# Altium PCB PCB_main.pcbdoc
Units mm, origin at the board's own origin, x right, y up, seen from the top; angles counter-clockwise.
Board outline 110 x 80 mm, 2 copper layers (Top Layer, Bottom Layer); 67 components, 60 nets, 247 pads, 42 vias.
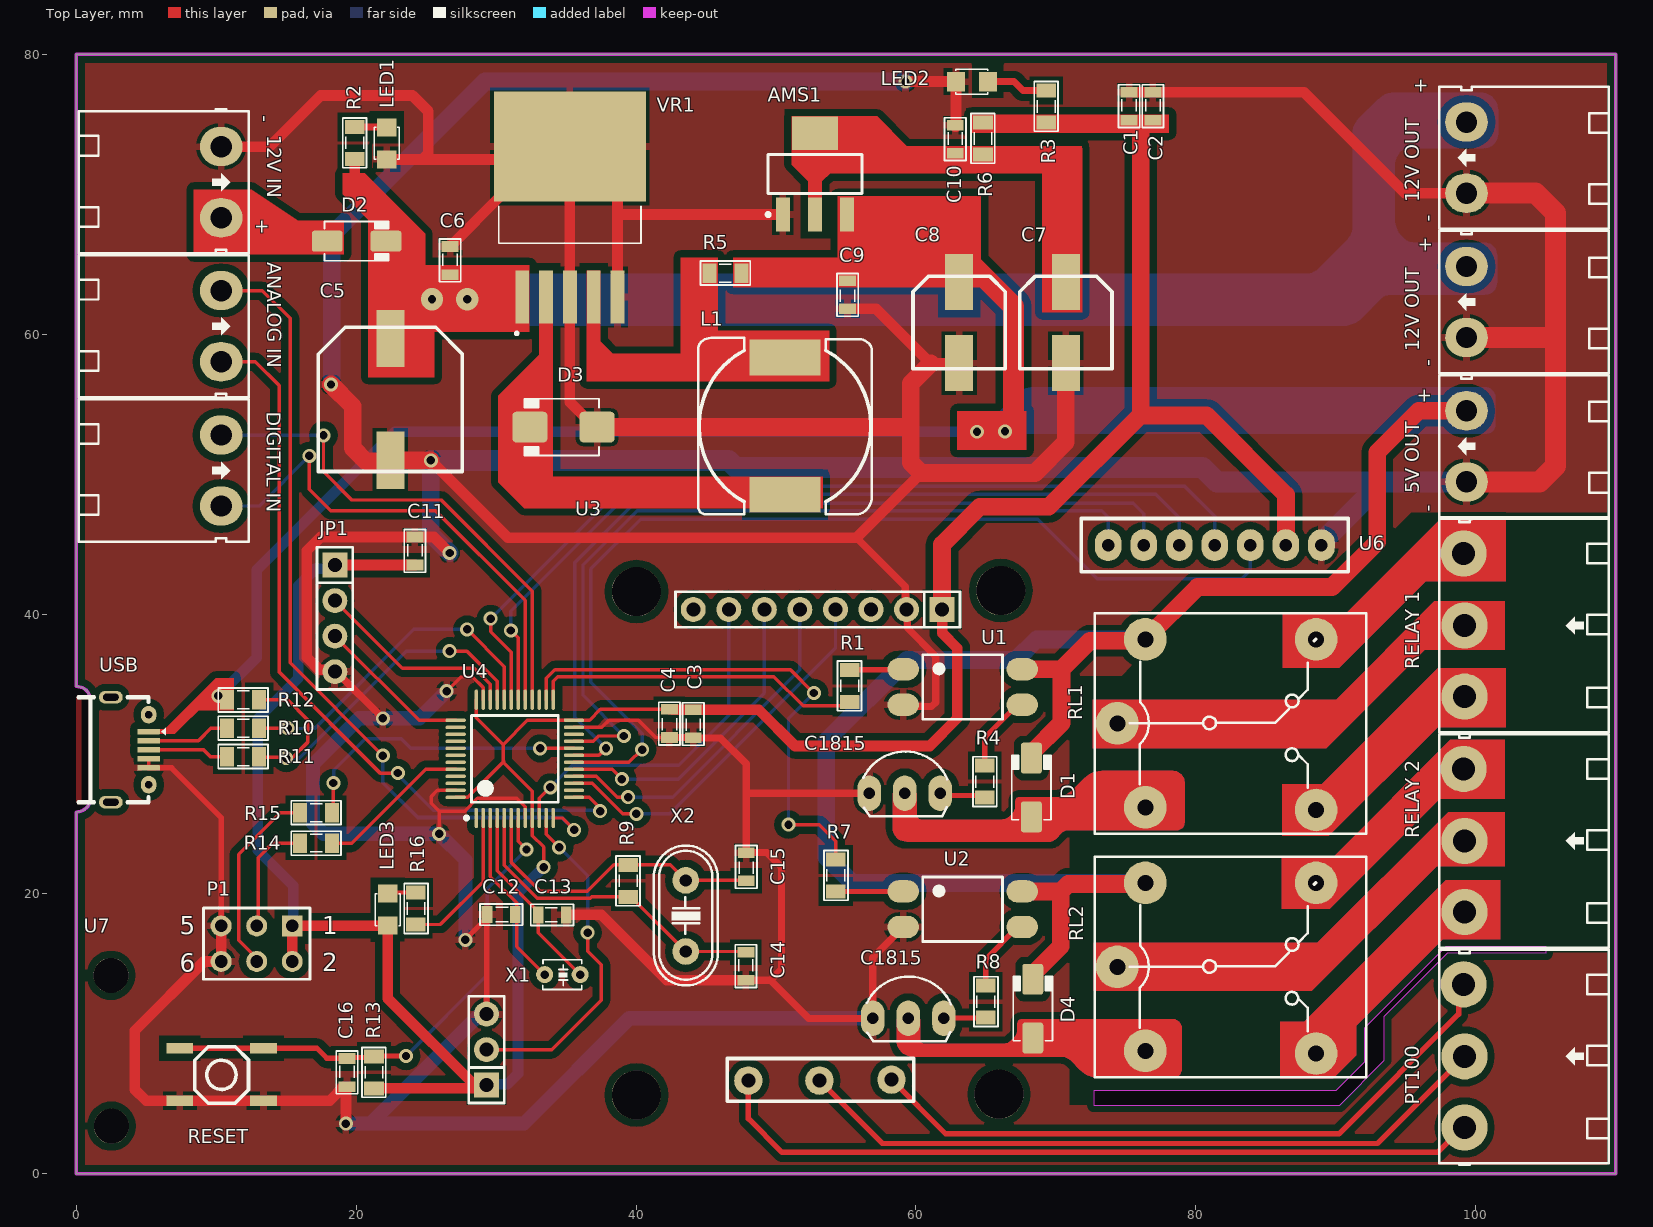
[diagram p0: Top Layer view]
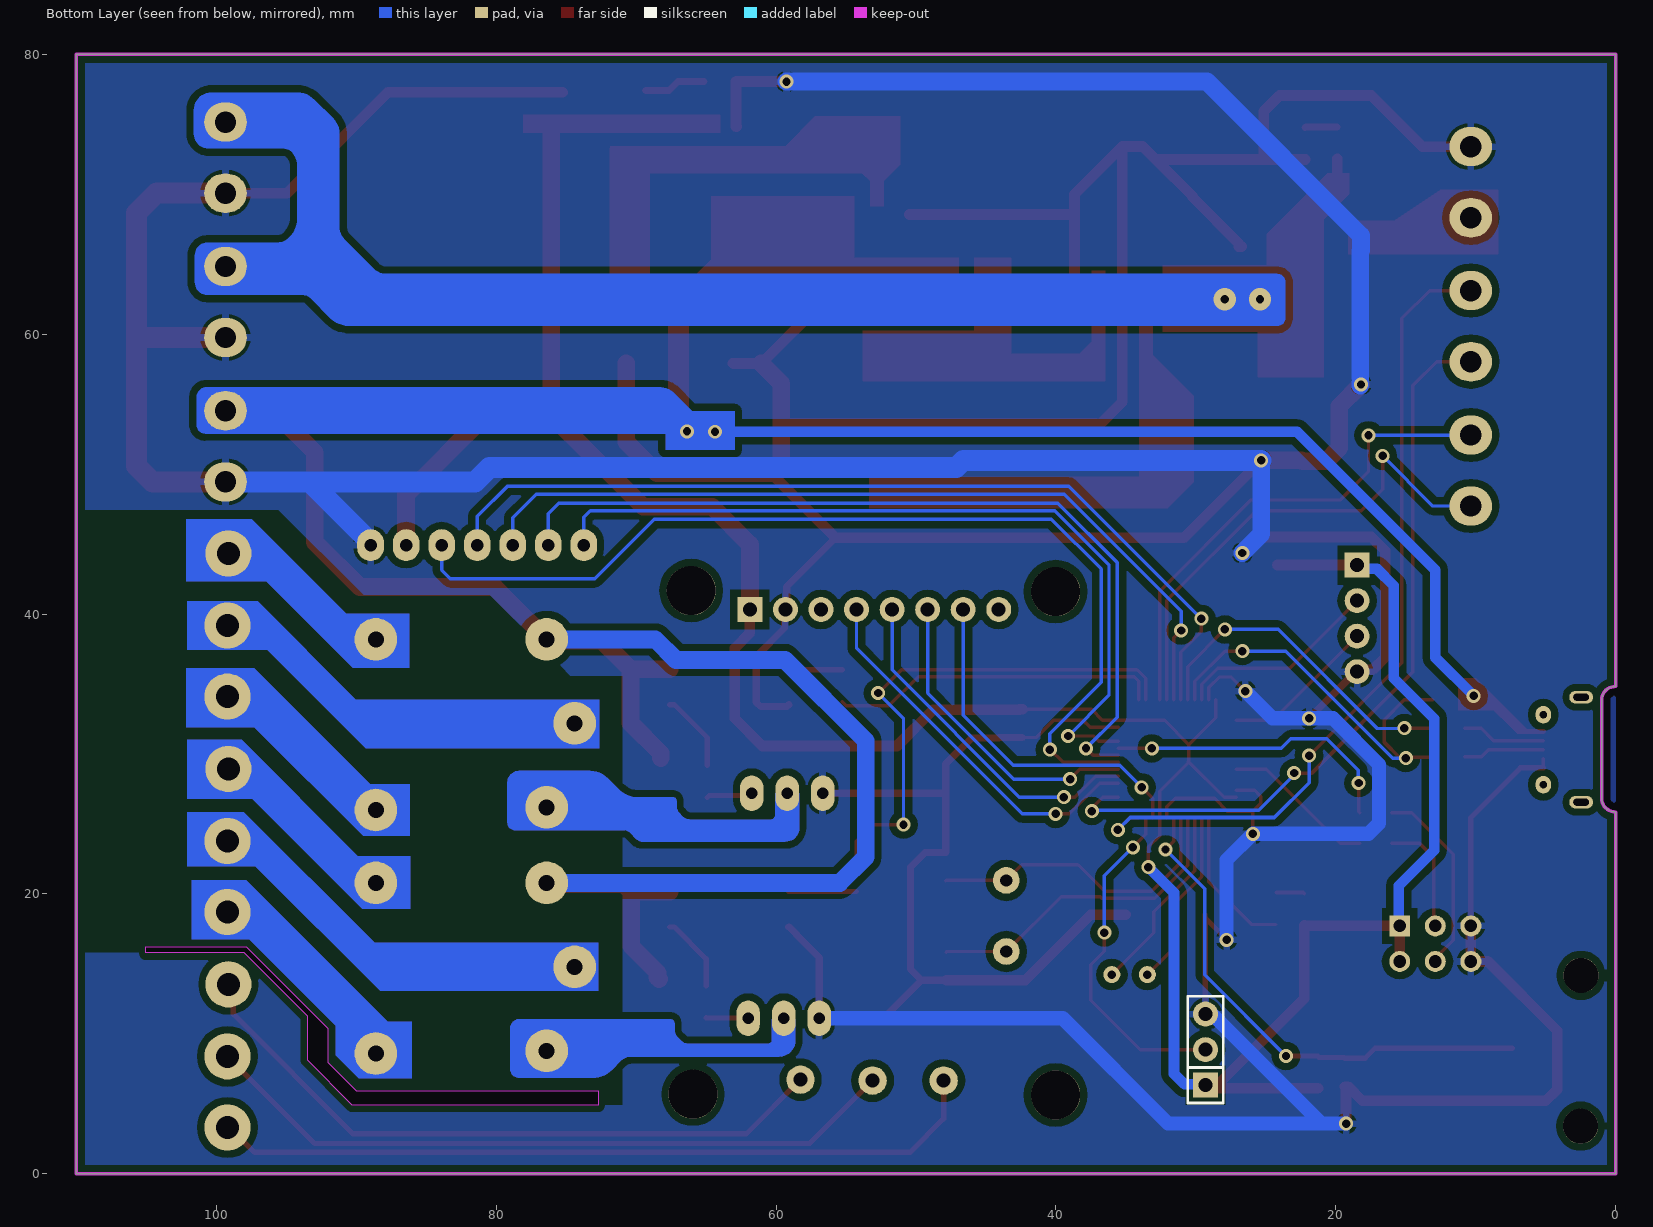
[diagram p1: Bottom Layer view, seen from below]

## Layer stack, top to bottom
Top Solder: solder mask 0.0102, Solder Resist, Dk 3.5
Top Layer: signal copper 0.0356
Dielectric 1: dielectric 0.32, FR-4, Dk 4.8
Bottom Layer: signal copper 0.0356
Bottom Solder: solder mask 0.0102, Solder Resist, Dk 3.5

## Board outline
0,0 0,25.855 ccw(c0,26.897) 0.737,26.16 ccw(c0.082,26.815) 1.009,26.815 1.009,33.874 ccw(c0.082,33.874) 0.737,34.529 ccw(c0,33.792) 0,34.834 0,80 110,80 110,0
cut-out: 105.022,16.221 97.833,16.221 92.017,10.404 92.017,7.991 89.985,5.959 72.713,5.959 72.713,4.918 90.264,4.918 93.465,8.118 93.465,11.268 97.986,15.789 105.022,15.789

## Design rules (kind name [scope] priority, off if disabled: settings)
Clearance [All] p1: gap=0.254 ignorepadtopadclearanceinfootprint=FALSE except(0: Arc-Hole Track-Hole SMDPad-Hole THPad-Hole Via-Hole Fill-Hole Poly-Hole Region-Hole Text-Hole; 0.508: Arc-Fill Arc-Poly Arc-Region Track-Fill Track-Poly Track-Region SMDPad-Fill SMDPad-Poly SMDPad-Region THPad-Fill THPad-Poly THPad-Region Via-Fill Via-Poly Via-Region Fill-Fill Fill-Poly Fill-Region Poly-Poly Poly-Region Region-Region)
HoleSize [All] p1: absolutevalues=TRUE maxlimit=5.08 minlimit=0.025 maxpercent=80.000 minpercent=20.000
HoleToHoleClearance [All] p1: gap=0 allowstackedmicrovias=TRUE
MinimumSolderMaskSliver [All] p1: minsoldermaskwidth=0
PolygonConnect [All] p1: connectstyle=Relief reliefconductorwidth=0.508 reliefentries=4 polygonreliefangle="90 Angle" airgapwidth=0.254
RoutingVias [All] p1: holewidth=0.6 width=1.6 viastyle="Through Hole" minholewidth=0.6 minwidth=1.6 maxholewidth=0.6 maxwidth=1.6
SilkToSolderMaskClearance [IsPad] p1: minsilkscreentomaskgap=0 clearancetoexposedcopper=TRUE
SolderMaskExpansion [All] p1: expansion=0.102
Width [All] p1: maxlimit=1.5 minlimit=0.241 preferedwidth=0.508
26 further rules are at their usual default settings.

## Components (designator, comment, footprint, x,y, rotation, side; value= is the part's Value field where it differs from the comment)
"5V OUT" "5V_OUT" HED2T 99.332,49.444 r90 top value="Header 2" (schematic designator HD3)
"12V IN" "12V_IN" HED2T 10.356,73.396 r270 top value="Header 2" (schematic designator HD5)
"12V OUT" "12V_OUT" HED2T 99.332,59.756 r90 top value="Header 2" (schematic designator HD4)
"12V OUT" "12V_OUT" HED2T 99.332,70.069 r90 top value="Header 2" (schematic designator HD2)
AMS1 "AMS1117-3.3V" SOT223 52.785,71.445 r0 top value="AMS1117-3.3V SOT223"
"ANALOG IN" "ANALOG IN" HED2T 10.356,63.109 r270 top value="Header 2" (schematic designator HD8)
C1 "104" SM-CAP-0805 75.227,77.435 r270 top value=0,1uF/300V
C2 "104" SM-CAP-0805 76.929,77.435 r270 top value=0,1uF/300V
C3 "104" SM-CAP-0805 44.087,31.003 r90 top value=0,1uF/300V
C4 "104" SM-CAP-0805 42.385,31.029 r90 top value=0,1uF/300V
C5 "680uF/25V" "tu nhom 10 (G)" 22.446,55.337 r270 top
C6 "104" SM-CAP-0805 26.713,66.411 r270 top value=0,1uF/300V
C7 "220uF/16V" "tu nhom 6.3 (d)" 70.706,60.823 r270 top
C8 "220uF/16V" "tu nhom 6.3 (d)" 63.086,60.823 r270 top
C9 "104" SM-CAP-0805 55.111,61.661 r90 top value=0,1uF/300V
C10 "104" SM-CAP-0805 62.807,75.072 r270 top value=0,1uF/300V
C11 "104" SM-CAP-0805 24.199,45.659 r270 top value=0,1uF/300V
C12 "20p" SM-CAP-0805 31.514,18.532 r180 top value=0,1uF/300V
C13 "20p" SM-CAP-0805 32.86,18.507 r0 top value=0,1uF/300V
C14 "20p" SM-CAP-0805 47.846,15.992 r270 top value=0,1uF/300V
C15 "20p" SM-CAP-0805 47.872,20.793 r90 top value=0,1uF/300V
C16 "20p" SM-CAP-0805 19.347,8.397 r270 top value=0,1uF/300V
C1815 "TR815" QTO-92 59.454,11.115 r0 top value=C1815 (schematic designator STA.TR2)
C1815 "TR815" QTO-92 59.2,27.193 r0 top value=C1815 (schematic designator STA.TR1)
D1 "1N4007" DO-214AC 68.242,27.608 r90 top
D2 "1N4007" DO-214AC 20.033,66.64 r0 top
D3 "1N5824" DO-214AA 34.816,53.355 r180 top
D4 "1N4007" DO-214AC 68.344,11.809 r90 top
"DIGITAL IN" "DIGITAL IN" HED2T 10.356,52.797 r270 top value="Header 2" (schematic designator HD9)
JP1 "SWD" "JP 1x4 DT" 18.484,43.5 r270 top
L1 "33uH/CD127" SRR1208 50.64,53.432 r90 top
LED1 "LED" LED-0805-Red 22.192,74.768 r270 top value="LED 3 ly Single Colour"
LED2 "LED" LED-0805-Red 65.144,78.044 r180 top value="LED 3 ly Single Colour"
LED3 "LED" LED-0805-Red 22.268,17.745 r90 top value="LED 3 ly Single Colour"
P1 "Header 3X2" HDR2X3 15.436,17.719 r180 top
PT100 "PT100" HED3T 99.195,3.317 r90 top value="Header 3" (schematic designator HD7)
R1 "330" RES-SMD-0805 55.263,34.864 r270 top
R2 "2.2k" RES-SMD-0805 19.906,73.663 r270 top
R3 "1k" RES-SMD-0805 69.309,76.266 r270 top
R4 "2k2" RES-SMD-0805 64.915,28.032 r90 top
R5 "0R" RES-SMD-0805 46.373,64.354 r180 top
R6 "0R" RES-SMD-0805 64.788,73.98 r270 top
R7 "330" RES-SMD-0805 54.272,21.326 r90 top
R8 "2k2" RES-SMD-0805 64.991,12.309 r90 top
R9 "1M" RES-SMD-0805 39.439,20.945 r270 top
R10 "20" RES-SMD-0805 11.931,31.842 r180 top
R11 "20" RES-SMD-0805 11.931,29.81 r180 top
R12 "4k7" RES-SMD-0805 11.931,33.874 r0 top
R13 "10k" RES-SMD-0805 21.278,7.254 r270 top
R14 "100k" RES-SMD-0805 17.138,23.637 r0 top
R15 "100k" RES-SMD-0805 17.138,25.796 r180 top
R16 "1k" RES-SMD-0805 24.275,18.964 r90 top
"RELAY 1" "RELAY" HED3T 99.195,34.102 r90 top value="Header 3" (schematic designator HD1)
"RELAY 2" "RELAY" HED3T 99.195,18.71 r90 top value="Header 3" (schematic designator HD6)
RESET "SW" "SW4 CMD M" 10.381,7.077 r0 top value="SW chip 2 pin" (schematic designator SW1)
RL1 "Relay" RL_SPDT_10A 74.388,32.192 r0 top value="Relay SPDT, 10A, 12V"
RL2 "Relay" RL_SPDT_10A 74.388,14.793 r0 top value="Relay SPDT, 10A, 12V"
U1 "PC817" SOP4 63.34,34.788 r0 top
U2 "PC817" SOP4 63.34,18.913 r0 top
U3 "MAX31865" MAX31865_module 71.392,46.853 r180 top
U4 "STM32F103C8T6_LQFP48" STM32_LQPF48 31.336,29.657 r90 top
U6 "LORA E32" "LORA E32" 74.11,47.463 r90 top
U7 "PhotoResistor" PhotoResistor_module 35.306,17.287 r180 top
USB "USB M" USB_MICRO_B 5.174,31.607 r270 top (schematic designator U5)
VR1 "LM2596S-5.0" TO170P1524X483-6N 35.273,69.053 r90 top
X1 "32.768Khz" "CRYSTAL 32,768 kHz" 36.01,14.239 r270 top value=4Mhz
X2 "8Mhz" XT2 43.554,18.43 r270 top value=4Mhz

## Footprints (in the part's own frame and the unit in brackets; to place one, negate y for a bottom-side part, rotate by r counter-clockwise, add the part's x,y. Pads: shape width x height; smd on the part's side, far side on the other; paste and mask are expansions set on the pad)
"CRYSTAL 32,768 kHz" [mil]
  round 48 hole 23.62: 1(0,0) 2(0,-100)
  silkscreen extent -42,-106 42,5, body extent -120,-105 321,6, height 66
DO-214AA [mm] "JEDEC DO214 variation AA. SMB"
  round 0.508 on Mech15: 0(0,0)
  rrect25% 2.5x2.2 smd: A(-2.4,0) K(2.4,0)
  silkscreen extent -2.54,-2.03 2.79,2.03, body extent -2.8,-1.97 2.8,1.98, height 2.62
DO-214AC [mm] "JEDEC DO214 variation AC. SMA"
  round 0.508 on Mech15: 0(0,0)
  rrect25% 2.2x1.5 smd: A(-2.1,0) K(2.1,0)
  silkscreen extent -2.3,-1.4 2.3,1.4, body extent -2.6,-1.3 2.6,1.3, height 2.42
HDR2X3 [mm] "Connector; Header; 3x2 Position"
  rect 1.5x1.5 hole 0.9: 1(0,0)
  round 1.5 hole 0.9: 2(0,2.54) 3(2.54,0) 4(2.54,2.54) 5(5.08,0) 6(5.08,2.54)
  silkscreen extent -1.27,-1.27 6.35,3.81, body extent -1.27,-1.27 6.35,3.81, height 8.77
HED2T [mil] "Header 2, 2 pin, hight 300mil, Pin to Pin 200, Colour Green"
  oval 110x120 hole 60: 1(0,0) 2(200,0)
  silkscreen extent -105,-400 300,77, body extent -98,-400 296,72, height 334
HED3T [mil] "Header 3, 3 pin, hight 300mil, Pin to Pin 200, Colour Green"
  round 130 hole 65: 1(402.62,2.62) 2(200,0) 3(0,0)
  silkscreen extent -105,-405 500,72, body extent -95,-404 496,68, height 124
"JP 1x4 DT" [mil] "4 pins, 1 row, straight, gold plating"
  rect 70x70 hole 39.37: 1(0,0)
  round 70 hole 39.37: 2(100,0) 3(200,0) 4(300,0)
  silkscreen extent -50,-50 350,50, body extent -50,-50 350,50, height 336
LED-0805-Red [mil]
  rect 50x55 smd: 1(0,0) 2(90,0)
  silkscreen extent 0,-35 90,35, body extent 5,-25 85,25, height 43
"LORA E32" [mil]
  oval 90x75 hole 35: 1(-100,15) 2(-100,-85) 3(-100,-185) 4(-100,-285) 5(-100,-385) 6(-100,-485) 7(-100,-585)
  silkscreen extent -175,-660 -25,90, body extent -160,-698 1749,128, height 555
MAX31865_module [mil]
  rect 70x70 hole 39.37: 1(375,257)
  round 70 hole 39.37: 2(475,257) 3(575,257) 4(675,257) 5(775,257) 6(875,257) 7(975,257) 8(1075,257)
  round 80 hole 40: 9(920,1582) 9(920,1582) 10(720,1582) 10(720,1582) 11(517.38,1579.38) 11(517.38,1579.38)
  round 137.8 hole 137.8: ""(210,203.85) ""(215,1620.5) ""(1235,1622.55) ""(1235,206.8)
  Top Layer lines w10: 884,266 875,257
  Top Layer lines w12: 675,272.69 675,257
  Top Layer lines w24: 517.38,1579.38 517.38,1559.62
  silkscreen extent 325,207 1125,1640, body extent 35,30 1413,1802, height 730
PhotoResistor_module [mil]
  rect 70x70 hole 39.37: 1(236,431) 1(236,431)
  round 70 hole 39.37: 2(236,331) 2(236,331) 3(236,231) 3(236,231)
  round 98.43 hole 98.43: ""(1291,546.3) ""(1292.3,122)
  silkscreen extent 186,181 286,481, body extent 8,29 1384,639, height 730
QTO-92 [mil] "TO-92"
  oval 66x100 hole 32: 1(-100,0) 2(0,0) 3(100,0)
  silkscreen extent -117,-65 120,118, body extent -109,-66 109,95, height 245
RES-SMD-0805 [mil]
  rect 39.37x55 smd: 1(-45,0) 2(45,0)
  silkscreen extent -70,-34 70,33, body extent -39,-25 39,25, height 31
RL_SPDT_10A [mil] "Relay SPDT, 5 pin, 10A,W 650mil, L 800mil, H 800mil"
  round 120 hole 45: 1(0,0) 2(559.06,236.22) 3(559.06,-243.78) 4(78.74,-236.22) 5(78.74,236.22)
  silkscreen extent -63,-311 700,310, body extent -55,-306 697,304, height 602
SM-CAP-0805 [mil]
  rect 30x47.24 smd: 1(6,0) 2(85,0)
  silkscreen extent -15,-30 105,30, body extent 6,-25 84,25, height 31
SOP4 [mm]
  oval 2.25x1.6 smd: 1(-4.25,1.27) 2(-4.25,-1.27) 3(4.25,-1.27) 4(4.25,1.27)
  silkscreen extent -2.85,-2.3 2.85,2.3, body extent -4.67,-2.29 4.93,2.31, height 3.6
SOT223 [mm]
  rect 1x2.4 smd: 1(-2.3,-2.9) 2(0,-2.9) 3(2.3,-2.9)
  rect 3.3x2.4 smd: 4(0,2.9)
  silkscreen extent -3.47,-3.02 3.35,1.4, body extent -3.25,-3.56 3.25,3.4, height 1.68
SRR1208 [mm]
  rect 2.54x5.1 smd: 1(-4.9,0) 2(4.9,0)
  silkscreen extent -6.3,-6.2 6.3,6.2, body extent -6.25,-6.25 6.25,6.25, height 7.52
STM32_LQPF48 [mm]
  oval 1.45x0.246 smd: 1(-4.225,2.75) 2(-4.225,2.25) 3(-4.225,1.75) 4(-4.225,1.25) 5(-4.225,0.75) 6(-4.225,0.25) 7(-4.225,-0.25) 8(-4.225,-0.75) 9(-4.225,-1.25) 10(-4.225,-1.75) 11(-4.225,-2.25) 12(-4.225,-2.75) 25(4.225,-2.75) 26(4.225,-2.25) 27(4.225,-1.75) 28(4.225,-1.25) 29(4.225,-0.75) 30(4.225,-0.25) 31(4.225,0.25) 32(4.225,0.75) 33(4.225,1.25) 34(4.225,1.75) 35(4.225,2.25) 36(4.225,2.75)
  oval 0.246x1.45 smd: 13(-2.75,-4.225) 14(-2.25,-4.225) 15(-1.75,-4.225) 16(-1.25,-4.225) 17(-0.75,-4.225) 18(-0.25,-4.225) 19(0.25,-4.225) 20(0.75,-4.225) 21(1.25,-4.225) 22(1.75,-4.225) 23(2.25,-4.225) 24(2.75,-4.225) 37(2.75,4.225) 38(2.25,4.225) 39(1.75,4.225) 40(1.25,4.225) 41(0.75,4.225) 42(0.25,4.225) 43(-0.25,4.225) 44(-0.75,4.225) 45(-1.25,4.225) 46(-1.75,4.225) 47(-2.25,4.225) 48(-2.75,4.225)
  silkscreen extent -4.35,-3.1 3.1,3.57, body extent -4.5,-4.5 4.5,4.5, height 1.6
"SW4 CMD M" [mil]
  rect 75x30 smd: 1(-117,75) 1(118,75) 2(-117,-73) 2(118,-73)
  silkscreen extent -75,-80 76,79, body extent -126,-101 126,103, height 60
TO170P1524X483-6N [mm]
  rect 3.79x0.99 smd: 1(-6.4,3.4) 2(-6.4,1.7) 3(-6.4,0) 4(-6.4,-1.7) 5(-6.4,-3.4)
  rect 7.88x10.84 smd paste-6: 6(4.35,0)
  silkscreen extent -9.1,-5.08 0.09,5.08, body extent -7.18,-5.08 7.18,5.08, height 4.65
"tu nhom 6.3 (d)" [mm]
  rect 4x2 smd: 1(-2.9,0) 2(2.9,0)
  silkscreen extent -3.3,-3.3 3.3,3.3, body extent -3.8,-3.3 3.8,3.3, height 8
"tu nhom 10 (G)" [mm]
  rect 4.1x2 smd: 1(-4.35,0) 2(4.35,0)
  silkscreen extent -5.15,-5.15 5.15,5.15, body extent -5.9,-5.25 5.9,5.25, height 10.5
USB_MICRO_B [mm] "USB_MICRO_B, banlinhkien"
  rrect10% 0.394x1.6 smd: 1(0,0) 2(0.65,0) 3(1.3,0) 4(1.95,0) 5(2.6,0)
  oval 0.9x1.7 hole 0.5 slot 1.1 at 90 deg: ""(-2.45,-2.7) ""(5.05,-2.7)
  oval 1.25x1.1 hole 0.5: ""(-1.2,0) ""(3.8,0)
  silkscreen extent -2.45,-5 5.05,1.22, body extent -2.45,-5 5.05,0.29, height 2.61
XT2 [mil] "Footpin for Crystal 2 pin"
  round 75 hole 34: 1(-100,0) 2(100,0)
  silkscreen extent -198,-90 195,90, body extent -233,-93 213,90, height 138

## Part data
"5V OUT" "12V IN" "12V OUT" "12V OUT" "ANALOG IN" "DIGITAL IN": library part "Header 2", "Header 2 (Green)"
AMS1: library part "AMS1117 SMD", "thegioiic. Dán (SOT-223)", Chung_Loai=Dán, Don_Vi=Con, Ma_Hang=MH000596
C1 C2 C3 C4 C6 C9 C10 C11 C12 C13 C14 C15 C16: library part "CAP SMD", Designed by=VanDungEvn
C5 C7 C8: library part "Tu Nhom 220uF 25V", "Dán. Mua ? thegioiic", Chung_Loai=Dán, Don_Vi=Con, Ma_Hang=MH002221, So_Chan=2, Ten_Linh_Kien="T? Nhôm 220uF 25V"
C1815 C1815: library part C1815, "NPN 600mW, ECB"
D1 D2 D4: library part "Diode  1N4007", "Diode 1A"
D3: library part DIODE_SCHOTTKY_MBRS130L, "Diode Schottky SMD 30V 2A DO-214AA", Manufacturer 1="Fairchild Semiconductor", Manufacturer Part Number 1=MBRS130L, Package / Case="DO-214AA, SMB", Ratings="30Vr; 2A", Supplier Part Number 1=MBRS130LFSCT-ND, Material=Si, SCDType=source, Supplier 1=Digi-Key
JP1: library part "JP 1x4 2.54 Duc Thang", "C?m", Chung_Loai=C?m, Don_Vi=Con, Ma_Hang=MH000903, Ten_Linh_Kien="Jump Ðon Ð?c 2.54MM 1x40P Th?ng 11MM"
L1: library part "Inductor Iron", "Inductor"
LED1 LED2 LED3: "LED RED 0805"
P1: "Header, 3-Pin, Dual row", LatestRevisionDate=17-Jul-2002, LatestRevisionNote="Re-released for DXP Platform.", Publisher="Altium Limited"
PT100 "RELAY 1" "RELAY 2": library part "Header 3", "Header 3 (Green)"
R1 R2 R3 R4 R5 R6 R7 R8 R9 R10 R11 R12 R13 R14 R15 R16: library part Res, "Res SMD 0805"
RESET: library part SW2, "Switch button 2 pin"
RL1 RL2: library part "Relay SRD", "Relay SPDT 5 Pin"
U1 U2: "Single Opto"
U3: library part "MAX31865 Module"
U4: library part STM32F103xx_LQFP48, "STM32 ARM-based 32-bit MCU with 64 Kbytes Flash, 48-pin LQFP, Industrial Temperature", ComponentLink1Description="Manufacturer Link", ComponentLink1URL=www.st.com/stm32, ComponentLink2Description=Datasheet, ComponentLink2URL=http://www.st.com/stonline/products/literature/ds/13587.pdf, DatasheetVersion="rev6, Mar-2008", PackageDescription="48-Pin Low-Profile Quad Flat Pack, 7 x 7 mm Body, 0.5 mm Pitch (LQFP48)", PackageReference=LQFP48, PackageVersion=Mar-2008, Published=30-May-2008, Publisher="Altium Limited"
VR1: "thegioiic. Dán (TO-263-5)", PACKAGE="TO-263-5 Texas Instruments", Availability="In Stock", Check_prices=https://www.snapeda.com/parts/LM2596S-5.0/NOPB/Texas+Instruments/view-part/?ref=eda, MF="Texas Instruments", MP=LM2596S-5.0/NOPB, Price=None, Purchase-URL=https://pricing.snapeda.com/search/part/LM2596S-5.0/NOPB/?ref=eda, SnapEDA_Link=https://www.snapeda.com/parts/LM2596S-5.0/NOPB/Texas+Instruments/view-part/?ref=snap
X1: library part XT2, "Crystal 32.768Khz 9pF and 12pF"
X2: library part XT2, "Crystal For all Crystal 2pin."

## Via types
v1: diameter 1, hole 0.6, Top Layer to Bottom Layer, 40 vias
v2: diameter 1.6, hole 0.6, Top Layer to Bottom Layer, 2 vias

## Nets (pads, with @x,y where several pads share a name; then routed paths per layer and width w, separated by ;. In a path a pad name is that pad's centre, name@x,y a point inside that pad or via, vN(x,y) a via of type N, cw(c..) or ccw(c..) an arc to the next point about the centre after c; other vN are vias at no path point)
+3.3V: C1.2 C2.2 C3.2 C4.2 C11.2 JP1.1 LED3.1 P1.1 P1.2 R3.2 R6.1 R13.2 U3.1 U4.9 U4.24 U4.36 U4.48 U6.6 U7.1 | length 207.1
  Top Layer w0.241: U4.48@27.112,26.908 27.977,26.908 30.498,29.429 ; U4.36 28.586,32.585 30.498,30.673 ; U4.9 32.586,24.165 33.394,23.358 v1(33.394,21.91) ; U4.9 32.585,27.341 30.562,29.365 30.562,29.492 30.498,29.556 30.498,30.673 ; C4.2 37.458,33.188 36.677,32.407 32.232,32.407 30.498,30.673
  Top Layer w0.508: P1.1 P1.1@15.449,17.732 ; LED3.1@22.256,17.732 LED3.1
  Top Layer w0.762: P1.2 P1.1 ; P1.1@15.449,17.732 LED3.1@22.256,17.732 ; JP1.1 C11.2 ; R13.2 U7.1@28.695,6.111 ; LED3.1 22.268,12.538 U7.1@28.695,6.111 ; U7.1@29.312,6.34 29.083,6.111 U7.1@28.695,6.111 ; C4.2 42.604,33.188 42.63,33.162 C3.2 48.761,33.162 51.351,30.572 60.978,30.572 62.959,32.553 62.959,37.557 61.867,38.649 U3.1
  Top Layer w1.27: U3.1 61.867,44.973 64.559,47.666 69.487,47.666 76.015,54.194 ; 76.066,74.844 76.066,54.244 76.015,54.194 ; U6.6 86.429,48.529 80.765,54.194 76.015,54.194
  Bottom Layer w0.762: P1.1 15.512,17.795 15.512,20.589 12.972,23.129 12.972,32.527 15.868,35.423 15.868,42.027 17.066,43.225 18.209,43.225 JP1.1 ; U7.1@29.312,6.34 29.368,6.396 30.808,6.396 31.565,7.153 31.565,20.081 v1(33.394,21.91)
+5V: "5V OUT.2" AMS1.3 C8.1 C9.2 D1.K D4.K R5.1 R12.1 RL1.5 RL2.5 U1.4 U2.4 USB.1 | length 244.5
  Top Layer w0.381: USB.1 6.967,31.607 9.234,33.874 R12.1
  Top Layer w1.27: U2.4 70.351,20.183 ; U1.4 70.401,36.058 ; D1.K 68.242,30.058 70.401,32.217 70.401,36.058 ; D4.K 68.459,14.024 68.459,14.374 70.351,16.266 70.351,20.183 ; RL2.5@76.726,20.716 70.884,20.716 70.351,20.183 ; 99.332,54.524 95.928,54.524 92.957,51.552 92.957,45.151 89.731,41.925 80.122,41.925 RL1.5 76.293,38.096 72.44,38.096 70.401,36.058
  Top Layer w1.5: 63.01,65.954 66.972,61.991 66.972,53.381
  Bottom Layer w0.762: v1(10.153,34.153) 12.896,36.896 12.896,43.145 22.776,53.025 v1(64.356,53.025)
  Bottom Layer w1.27: RL2.5 55.441,20.793 53.587,22.647 53.587,30.953 59.352,36.718 67.15,36.718 68.623,38.192 RL1.5
  Bottom Layer w1.5: v1(66.363,53.051) 67.836,54.524 99.332,54.524
+12V: "12V OUT.2" C5.1 C6.2 D2.K R2.2 VR1.1 | length 112.5
  Top Layer w0.762: R2.2 19.906,70.297 21.456,68.748 21.456,67.009 21.825,66.64 D2.K 22.29,66.483 22.29,60.62 22.329,60.62 24.362,62.653 VR1.1
  Bottom Layer w1.5: v2(27.933,62.499) 89.629,62.499 91.966,64.836 ; 99.332,64.836 91.966,64.836 ; 99.332,75.149 93.719,75.149 91.966,73.396 91.966,64.836
  other v2: 25.418,62.499
analog_1: "ANALOG IN.1" U4.12 | length 58.6
  Top Layer w0.241: U4.12 34.723,25.432 v1(35.578,24.577)
  Top Layer w0.254: 10.356,63.109 13.302,63.109 15.283,61.128 15.283,36.515 v1(21.913,29.886)
  Bottom Layer w0.254: v1(21.913,29.886) 21.913,27.955 24.402,25.466 34.689,25.466 v1(35.578,24.577)
analog_2: "ANALOG IN.2" U4.13 | length 54.8
  Top Layer w0.241: U4.13@35.562,26.906 36.652,26.906 37.432,26.126 v1(37.432,25.923)
  Top Layer w0.254: 10.356,58.029 12.794,58.029 14.496,56.327 14.496,35.855 21.71,28.641 v1(22.98,28.641)
  Bottom Layer w0.254: v1(22.98,28.641) 22.98,28.514 25.52,25.974 37.381,25.974 v1(37.432,25.923)
AUX_LORA: U4.18 U6.5 | length 72
  Top Layer w0.241: U4.18 39.491,29.407 40.402,30.318 v1(40.429,30.318)
  Bottom Layer w0.241: v1(40.429,30.318) 40.429,31.461 36.772,35.118 36.772,43.221 40.328,46.777 68.7,46.777 72.941,42.535 83.279,42.535 83.889,43.145 U6.5
BOOT0: R14.2 U4.44 | length 11
  Top Layer w0.241: R14.2 19.703,23.637 24.973,28.907 U4.44
BOOT1: R15.1 U4.20 | length 21.5
  Top Layer w0.241: R15.1 18.357,25.873 v1@18.357,27.955 ; v1(33.153,30.407) U4.20
  Bottom Layer w0.241: v1(18.371,27.928) 18.401,27.959 18.401,28.838 20.643,31.08 23.234,31.08 23.906,30.407 v1(33.153,30.407)
CLK_MAX: U3.4 U4.15 | length 27.3
  Top Layer w0.241: U4.15 36.871,27.907 39.058,25.72 v1(40.023,25.72)
  Bottom Layer w0.241: v1(40.023,25.72) 42.411,25.72 54.247,37.557 U3.4
CS_MAX: U3.7 U4.10 | length 25
  Top Layer w0.241: U4.10 33.086,26.835 v1(33.876,27.625)
  Bottom Layer w0.254: v1(33.876,27.625) 35.451,29.2 43.046,29.2 46.627,32.781 U3.7
dig_1: "DIGITAL IN.1" U4.28 | length 36.1
  Top Layer w0.241: v1(17.671,52.771) 17.671,50.155 19.678,48.148 26.078,48.148 32.586,41.641 U4.28
  Bottom Layer w0.241: 10.356,52.797 10.369,52.784 17.658,52.784 v1(17.671,52.771)
dig_2: "DIGITAL IN.2" U4.29 | length 36.7
  Top Layer w0.241: 10.356,47.717 10.838,47.234 ; v1(16.655,51.298) 16.655,48.91 18.179,47.386 25.672,47.386 32.086,40.972 U4.29
  Bottom Layer w0.241: 10.356,47.717 13.074,47.717 v1(16.655,51.298)
GND: "5V OUT.1" "12V IN.1" "12V OUT.1" AMS1.1 C1.1 C2.1 C3.1 C4.1 C5.2 C6.1 C7.2 C8.2 C9.1 C10.1 C11.1 C12.2 C13.2 C14.2 C15.2 C16.2 C1815.1 D3.A JP1.4 LED1.2 LED2.2 P1.5 P1.6 RESET.2 U1.2 U2.2 U3.2 U4.8 U4.23 U4.35 U4.47 U6.7 U7.3 USB.4 USB.5 VR1.3 VR1.5 VR1.6 | length 688.3
  Top Layer w0.241: v1@25.901,24.272 v1(25.926,24.298) 25.926,25.923 ; v1(26.47,34.493) 27.475,35.499 28.339,35.499 29.085,34.753 U4.35@29.085,33.883 ; U4.47 25.81,27.407 25.367,26.965 25.367,26.482 25.926,25.923 ; U4.8 32.085,26.239 31.486,26.838 28.669,26.838 27.755,25.923 25.926,25.923 ; U4.23 37.549,31.907 38.067,32.426 40.175,32.426 41.42,31.181 C4.1
  Top Layer w0.254: USB.5 USB.4
  Top Layer w0.381: USB.5 6.815,29.007 10.356,25.466 P1.5 ; v1(27.806,16.729) 27.806,16.764 C12.2@29.333,18.291 ; U7.3@29.312,11.42 29.333,11.442 C12.2@29.333,18.291 ; C12.2 29.355,18.313 C12.2@29.333,18.291
  Top Layer w0.508: JP1.4 18.585,35.88 v1(21.913,32.553) ; C4.1 42.398,31.169 44.074,31.169 C3.1 46.017,31.156 47.872,29.302 47.872,27.143 ; C14.2 49.599,13.833 ; 55.753,45.456 59.233,41.976 59.233,40.419 U3.2 59.39,40.263 59.39,38.993 61.41,36.972 61.41,33.689 61.112,33.391 59.217,33.391 U1.2 ; C1815.1@56.66,27.193 47.922,27.193 47.872,27.143 ; U2.2 59.061,17.643 58.556,17.139 58.556,17.109 56.914,15.467 56.914,11.115 52.317,11.115 49.599,13.833 ; 47.872,27.143 C15.2 49.345,22.952 50.386,21.91 50.386,14.62 49.599,13.833
  Top Layer w0.762: P1.5 P1.6 9.126,15.179 4.184,10.237 4.184,6.035 4.996,5.222 7.409,5.222 13.378,5.222 18.112,5.222 19.128,6.238 C16.2@19.271,6.238 ; 10.356,73.396 13.81,73.396 17.468,77.054 24.021,77.054 25.164,75.911 25.164,72.928 24.718,72.482 ; JP1.4 18.354,36.01 17.389,36.01 16.477,36.922 16.477,44.516 17.468,45.507 C11.1 25.545,45.507 v1(26.688,44.364) ; v1(19.271,3.597) C16.2@19.271,6.238 ; C16.2 C16.2@19.271,6.238 ; LED1.2 24.718,72.482 ; v1(25.332,50.977) 30.854,45.456 55.753,45.456 60.376,50.079 ; C6.1 26.932,66.259 26.932,66.478 30.234,69.779 30.234,69.844 VR1.6@32.872,72.482 ; C13.2 37.508,18.507 42.182,13.833 C14.2 ; D3.A 37.066,53.355 35.273,55.148 VR1.3 VR1.6 ; VR1.5 38.673,68.392 ; AMS1.1 38.826,68.545 38.673,68.392 ; C9.1 57.143,61.814 61.054,57.902 63.065,57.902 C8.2 ; v1@59.225,78.07 v1(59.251,78.044) LED2.2 62.858,74.818 C10.1@62.807,74.818 ; C1.1 C2.1 87.724,77.282 94.938,70.069 99.332,70.069 ; 24.718,72.482 VR1.6@32.872,72.482 ; VR1.6@32.872,72.482 33.793,73.403 VR1.6 ; VR1.6 38.673,70.003 38.673,68.392
  Top Layer w1.27: v1(18.204,56.403) 19.754,54.854 19.754,51.857 20.694,50.917 22.377,50.917 C5.2 25.323,50.987 v1(25.332,50.977) ; D3.A 59.632,53.355 ; 61.054,57.902 59.632,56.48 59.632,53.355 ; C7.2 70.706,52.289 68.496,50.079 60.376,50.079 59.632,50.823 59.632,53.355
  Top Layer w1.5: 99.332,49.444 104.539,49.444 105.682,50.587 105.682,59.934 ; 99.332,59.756 105.504,59.756 105.682,59.934 ; 99.332,70.069 104.26,70.069 105.682,68.646 105.682,59.934
  Bottom Layer w1.016: v1(19.271,3.597) 21.024,3.597 ; v1(26.47,34.493) 24.529,32.553 v1(21.913,32.553) 20.211,32.553 16.909,29.251 16.909,25.06 17.671,24.298 v1(25.926,24.298) 27.806,22.418 v1(27.806,16.729) ; U7.3@29.312,11.42 29.2,11.308 28.735,11.308 21.024,3.597 ; C1815.1@56.914,11.115 39.515,11.115 31.997,3.597 21.024,3.597
  Bottom Layer w1.27: v1@18.255,56.327 18.255,65.928 18.197,65.987 18.197,67.039 29.203,78.044 v1(59.251,78.044) ; v1(25.332,50.977) 25.332,45.719 v1(26.688,44.364)
  Bottom Layer w1.5: v1(25.332,50.977) 46.617,50.977 47.123,50.472 80.473,50.472 81.501,49.444 93.3,49.444 ; U6.7 88.969,45.113 93.3,49.444 ; 99.332,49.444 93.3,49.444
M0_LORA: U4.21 U6.1 | length 58.5
  Top Layer w0.241: U4.21 36.93,30.907 37.307,31.284 v1(39.132,31.284)
  Bottom Layer w0.241: v1(39.132,31.284) 36.213,34.204 36.213,43.526 40.074,47.386 73.259,47.386 73.729,46.916 U6.1
M1_LORA: U4.19 U6.2 | length 61.7
  Top Layer w0.241: U4.19 37.352,29.907 v1(37.855,30.41)
  Bottom Layer w0.241: 75.532,47.92 76.269,47.183 U6.2
  Bottom Layer w0.254: v1(37.855,30.41) 35.629,32.636 35.629,43.678 39.871,47.92 75.532,47.92
NetAMS1_2: AMS1.2 AMS1.4 C7.1 C10.2 R6.2
NetD1_A: C1815.2@59.2,27.193 D1.A RL1.4 | length 11.3
  Top Layer w0.381: C1815.2@59.321,27.073 59.2,27.193 59.2,25.593 59.86,24.933 67.683,24.933 68.242,25.492 D1.A
NetD2_A: "12V IN.2" D2.A | length 8.3
  Top Layer w0.762: 10.356,68.316 10.722,68.316 12.399,66.64 D2.A
NetD3_K: D3.K L1.1 VR1.2 | length 0
  Top Layer w0.508: D3.K D3.K@32.43,53.37
NetD4_A: C1815.2@59.454,11.115 D4.A RL2.4 | length 11.1
  Top Layer w0.381: C1815.2@59.454,11.115 59.587,10.982 59.587,9.256 59.81,9.032 67.784,9.032 68.344,9.592 D4.A
NetHD1_1: "RELAY 1.1" RL1.2
NetHD1_2: "RELAY 1.2" RL1.1 | length 27.7
  Top Layer w1.5: RL1.1 89.598,32.192 96.259,38.852 98.865,38.852 99.195,39.182
NetHD1_3: "RELAY 1.3" RL1.3
NetHD6_1: "RELAY 2.1" RL2.2
NetHD6_2: "RELAY 2.2" RL2.1 | length 28.5
  Top Layer w1.5: RL2.1 88.582,14.793 97.235,23.445 98.85,23.445 99.195,23.79
NetHD6_3: "RELAY 2.3" RL2.3
NetHD7_1: PT100.1 U3.11 | length 47.9
  Top Layer w0.381: U3.11@58.251,6.737 62.127,2.86 90.213,2.86 98.771,11.418 98.771,13.186 PT100.1
NetHD7_2: PT100.2 U3.10 | length 50.5
  Top Layer w0.381: U3.10@53.104,6.67 57.6,2.174 92.972,2.174 PT100.2
NetHD7_3: PT100.3 U3.9 | length 55.6
  Top Layer w0.381: U3.9@48.024,6.67 48.024,3.952 50.437,1.539 97.249,1.539 99.027,3.317 PT100.3
NetL1_2: L1.2 R5.2 VR1.4 | length 0.1
  Top Layer w0.508: L1.2@50.536,58.435 L1.2
NetLED1_1: LED1.1 R2.1 | length 2.3
  Top Layer w0.508: R2.1 19.925,74.787 22.173,74.787 LED1.1
NetLED2_1: LED2.1 R3.1 | length 4.4
  Top Layer w0.508: LED2.1 67,78.044 67.635,77.409 R3.1
NetLED3_2: LED3.2 R16.2 | length 2
  Top Layer w0.254: LED3.2 22.345,20.107 R16.2
NetP1_3: P1.3 R14.1 | length 8.3
  Top Layer w0.254: P1.3 12.997,17.821 12.997,22.596 14.039,23.637 R14.1
NetP1_4: P1.4 R15.2 | length 13.8
  Top Layer w0.241: P1.4@12.896,15.319 12.896,15.408 11.6,16.703 11.6,22.825 14.572,25.796 R15.2
  Top Layer w0.254: P1.4 P1.4@12.896,15.319
NetR1_1: R1.1 U1.1 | length 3.8
  Top Layer w0.381: R1.1 55.288,36.033 59.065,36.033 U1.1
NetR4_1: C1815.3@61.74,27.193 R4.1 | length 3.3
  Top Layer w0.381: C1815.3@61.74,27.193 61.892,27.041 64.763,27.041 R4.1
NetR4_2: R4.2 U1.3 | length 5.6
  Top Layer w0.381: R4.2 64.915,31.168 67.265,33.518 U1.3
NetR7_1: R7.1 U2.1 | length 4.9
  Top Layer w0.381: R7.1 U2.1 U2.1@59.12,20.213
NetR8_1: C1815.3@61.994,11.115 R8.1 | length 3
  Top Layer w0.381: C1815.3@61.994,11.115 62.019,11.141 64.966,11.141 R8.1
NetR8_2: R8.2 U2.3 | length 5.5
  Top Layer w0.381: R8.2 64.991,15.369 67.265,17.643 U2.3
NetR10_2: R10.2 USB.2 | length 6
  Top Layer w0.254: USB.2 8.735,30.957 9.619,31.842 R10.2
NetR11_2: R11.2 USB.3 | length 5.8
  Top Layer w0.254: USB.3 9.096,30.307 9.594,29.81 R11.2
OSC_IN: C14.1 R9.2 U4.5 X2.2 | length 23.3
  Top Layer w0.241: U4.5 30.586,22.051 32.949,19.688 36.723,19.688 36.837,19.802 39.637,19.802 43.549,15.89 X2.2 47.795,15.89 C14.1
OSC_OUT: C15.1 R9.1 U4.6 X2.1 | length 22.1
  Top Layer w0.241: U4.6@31.087,25.431 31.087,22.25 33.154,20.183 36.518,20.183 38.423,22.088 R9.1 42.436,22.088 X2.1 47.846,20.97 C15.1
PA11: R10.1 U4.32 | length 23.9
  Top Layer w0.241: v1(27.933,38.903) 30.586,36.249 U4.32
  Top Layer w0.254: R10.1 v1(15.106,31.842)
  Bottom Layer w0.241: v1(15.106,31.842) 15.123,31.824 17.044,31.824 24.123,38.903 v1(27.933,38.903)
PA12: R11.1 R12.2 U4.33 | length 30
  Top Layer w0.241: v1(26.688,37.353) 27.922,37.353 30.086,35.189 U4.33
  Top Layer w0.254: R11.1 13.124,29.759 15.004,29.759 15.461,29.759 16.528,30.826 16.528,32.451 15.106,33.874 R12.2
  Bottom Layer w0.241: v1(15.004,29.708) 15.944,29.708 23.589,37.353 v1(26.688,37.353)
PC13: R16.1 U4.2 | length 10.6
  Top Layer w0.241: R16.1 26.028,17.821 29.086,20.879 U4.2
PC14: C12.1 U4.3 X1.2 | length 12.8
  Top Layer w0.241: U4.3 29.586,21.247 31.463,19.37 31.463,16.246 X1.2
PC15: C13.1 U4.4 X1.1 | length 13.6
  Top Layer w0.241: U4.4 30.086,21.652 33.013,18.726 C13.1 33.013,17.237 X1.1
photo_res: U4.11 U7.2 | length 24.3
  Top Layer w0.241: U7.2@29.312,8.88 33.978,8.88 37.508,12.411 37.508,14.951 36.543,15.916 v1(36.543,17.237) ; U4.11 33.586,24.258 v1(34.511,23.333)
  Bottom Layer w0.241: v1(34.511,23.333) 36.543,21.301 v1(36.543,17.237)
relay_pin1: R1.2 U4.25 | length 23.6
  Top Layer w0.241: U4.25 34.086,35.201 34.41,35.525 49.853,35.525 51.936,33.442 54.984,33.442 R1.2
relay_pin2: R7.2 U4.26 | length 36.9
  Top Layer w0.241: U4.26 33.586,35.402 34.204,36.02 51.034,36.02 v1(52.698,34.356) ; v1(50.894,24.958) 53.079,24.958 54.272,23.764 R7.2
  Bottom Layer w0.241: v1(50.894,24.958) 50.894,32.553 v1(52.698,34.356)
RESET: C16.1 R13.1 RESET.1 U4.7 | length 37.4
  Top Layer w0.241: U4.7 31.586,23.768 v1(32.174,23.18)
  Top Layer w0.381: RESET.1@7.409,8.982 13.378,8.982 17.188,8.982 17.9,8.27 19.322,8.27 C16.1 19.424,8.321 21.202,8.321 R13.1 21.303,8.423 v1(23.564,8.423)
  Bottom Layer w0.241: v1(23.564,8.423) 29.38,14.239 29.38,20.386 v1(32.174,23.18)
RX1_LORA: U4.31 U6.4 | length 65
  Top Layer w0.241: v1(29.609,39.665) 29.609,38.75 31.086,37.273 U4.31
  Bottom Layer w0.254: v1(29.609,39.665) 39.083,49.139 79.19,49.139 81.349,46.98 U6.4
SDI_MAX: U3.6 U4.17 | length 22.4
  Top Layer w0.241: U4.17 35.564,28.905 38.286,28.905 v1(38.982,28.209)
  Bottom Layer w0.241: v1(38.982,28.209) 43.02,28.209 49.167,34.356 U3.6
SDO_MAX: U3.5 U4.16 | length 24.8
  Top Layer w0.241: U4.16 37.158,28.407 38.651,26.914 v1(39.439,26.914)
  Bottom Layer w0.241: v1(39.439,26.914) 42.614,26.914 51.707,36.007 U3.5
SWDCLK: JP1.3 U4.37 | length 11.1
  Top Layer w0.241: JP1.3 24.497,32.407 U4.37
SWDIO: JP1.2 U4.34 | length 14.7
  Top Layer w0.241: JP1.2 23.31,36.134 28.441,36.134 29.586,34.989 U4.34
TX1_LORA: U4.30 U6.3 | length 60.4
  Top Layer w0.241: v1(31.057,38.827) 31.586,38.297 U4.30
  Bottom Layer w0.241: v1(31.057,38.827) 31.057,40.198 39.413,48.555 77.132,48.555 78.809,46.878 U6.3
pads on no net: D1.0 D2.0 D3.0 D4.0 U3. U3.3 U3.8 U4.1 U4.14 U4.22 U4.27 U4.38 U4.39 U4.40 U4.41 U4.42 U4.43 U4.45 U4.46 U7. USB.

## Polygon pours and split planes (outlines as drawn)
GND on Bottom Layer "GND_L02_P000" (solid, pour order 0): 0,80 110,80 110,47.463 95.547,47.463 89.451,41.367 80.46,41.367 74.694,35.601 70.935,35.601 70.935,4.918 90.264,4.918 93.465,8.118 93.465,11.268 97.986,15.789 110,15.789 110,0 0,0
GND on Top Layer "GND_L01_P001" (solid, pour order 1): 0,80 110,80 110,47.285 95.37,47.285 89.451,41.367 80.46,41.367 74.694,35.601 70.935,35.601 70.935,4.918 90.264,4.918 93.465,8.118 93.465,11.268 97.986,15.789 110,15.789 110,0 0,0

## Keep-outs
Keep-Out Layer:
  the board outline again, w0.254

## Other copper
Top Layer:
  region net NetD4_A: 58.616,11.064 58.616,9.54 ccw(c59.784,9.54) 59.784,8.372 70.364,8.372 cw(c70.364,7.361) 71.078,8.076 71.711,7.443 ccw(c73.087,8.819) 73.087,6.873 78.352,6.873 ccw(c78.352,7.508) 78.987,7.508 78.987,10.404 ccw(c78.326,10.404) 78.326,11.064 67.582,11.064 ccw(c67.582,10.729) 67.247,10.729 67.247,10.255 cw(c66.614,10.255) 67.061,9.807 66.75,9.496 cw(c66.306,9.94) 66.306,9.312 60.546,9.312 cw(c60.546,9.566) 60.292,9.566 60.292,11.064
  region net NetD1_A: 58.336,27.193 58.336,24.73 ccw(c59.327,24.73) 59.327,23.739 69.532,23.739 ccw(c69.532,24.367) 69.976,23.923 70.464,24.411 cw(c70.803,24.072) 70.803,24.552 78.656,24.552 ccw(c78.656,25.085) 79.19,25.085 79.19,27.981 ccw(c78.377,27.981) 78.377,28.794 73.266,28.794 ccw(c73.266,27.03) 72.018,28.277 71.161,27.419 cw(c69.941,28.639) 69.941,26.914 67.379,26.914 ccw(c67.379,26.635) 67.099,26.635 67.099,26.239 cw(c66.459,26.239) 66.912,25.787 66.695,25.57 cw(c66.077,26.187) 66.077,25.314 60.419,25.314 cw(c60.419,25.695) 60.038,25.695 60.038,27.193
  region net +5V: 11.255,33.137 11.255,35.398 9.975,35.398 6.368,31.791 6.368,31.607 7.192,31.607 ccw(c7.192,31.627) 7.206,31.613 8.73,33.137
  region net NetD3_K: 33.089,62.347 33.089,58.512 30.168,55.591 30.168,49.418 32.022,47.564 53.333,47.564 53.333,49.825 34.054,49.825 34.054,62.347
  region net +5V: 62.959,51.73 67.887,51.73 67.887,54.498 62.959,54.498
  region net NetHD1_1: 86.2,40.02 86.2,36.16 90.239,36.16 96.411,42.332 102.126,42.332 102.126,46.777 97.452,46.777 90.696,40.02
  region net NetHD1_2: 72.637,33.874 72.637,30.419 89.299,30.419 96.335,37.455 102.075,37.455 102.075,40.909 97.046,40.909 90.01,33.874
  region net NetHD1_3: 86.175,27.854 86.175,24.145 89.502,24.145 97.275,31.918 102.126,31.918 102.126,36.134 97.275,36.134 88.994,27.854
  region net NetHD6_1: 86.124,22.698 86.124,18.938 89.553,18.938 94.481,23.866 97.43,26.815 102.05,26.815 102.05,31.003 98.189,31.003 89.883,22.698
  region net NetHD6_2: 72.713,16.5 72.713,13.071 88.283,13.071 97.198,21.986 102.05,21.986 102.05,25.855 98.019,25.855 88.664,16.5
  region net NetHD6_3: 86.022,6.823 89.807,6.823 91.458,8.474 91.458,10.582 97.63,16.754 101.745,16.754 101.745,20.996 97.859,20.996 87.75,10.887 86.022,10.887
  region net +3.3V: 63.975,75.682 78.072,75.682 78.072,74.387 63.975,74.387
  region net NetAMS1_2: 52.291,69.154 52.291,70.932 51.123,72.101 51.123,75.555 57.219,75.555 59.352,73.421 71.849,73.421 71.849,71.491 53.866,71.491 53.282,70.907 53.282,69.154
  region net NetL1_2: 36.492,64.531 36.492,56.632 53.79,56.632 53.79,60.239 45.84,60.239 45.84,65.471 43.198,65.471 43.198,58.588 38.347,58.588 37.458,59.477 37.458,64.531
  region net NetD2_A: 19.119,65.7 8.4,65.7 8.4,70.323 12.54,70.323 15.868,68.113 19.119,68.113
  region net NetAMS1_2: 69.03,61.56 69.03,73.294 71.875,73.294 71.875,61.56
  region net +5V: 46.932,63.363 46.932,65.471 54.425,65.471 54.425,69.865 64.636,69.865 64.636,63.363
  region net +12V: 20.617,71.491 19.043,71.491 19.043,69.992 20.871,68.164 20.871,56.937 25.596,56.937 25.596,60.163 32.378,60.163 32.378,64.938 24.935,64.938 24.935,67.173
Bottom Layer:
  region net +5V: 65.982,54.473 67.352,55.843 cw(c68.214,54.98) 68.214,56.2 100.704,56.2 cw(c100.704,55.514) 101.389,55.514 101.389,53.508 cw(c100.78,53.508) 100.78,52.898 65.982,52.898
  region net NetD4_A: 58.616,11.064 58.616,9.54 ccw(c59.784,9.54) 59.784,8.372 70.364,8.372 cw(c70.364,7.361) 71.078,8.076 71.711,7.443 ccw(c73.087,8.819) 73.087,6.873 78.352,6.873 ccw(c78.352,7.508) 78.987,7.508 78.987,10.404 ccw(c78.326,10.404) 78.326,11.064 67.582,11.064 ccw(c67.582,10.729) 67.247,10.729 67.247,10.255 cw(c66.614,10.255) 67.061,9.807 66.75,9.496 cw(c66.306,9.94) 66.306,9.312 60.546,9.312 cw(c60.546,9.566) 60.292,9.566 60.292,11.064
  region net NetD1_A: 58.336,27.193 58.336,24.73 ccw(c59.327,24.73) 59.327,23.739 69.532,23.739 ccw(c69.532,24.367) 69.976,23.923 70.464,24.411 cw(c70.803,24.072) 70.803,24.552 78.656,24.552 ccw(c78.656,25.085) 79.19,25.085 79.19,27.981 ccw(c78.377,27.981) 78.377,28.794 73.266,28.794 ccw(c73.266,27.03) 72.018,28.277 71.161,27.419 cw(c69.941,28.639) 69.941,26.914 67.379,26.914 ccw(c67.379,26.635) 67.099,26.635 67.099,26.239 cw(c66.459,26.239) 66.912,25.787 66.695,25.57 cw(c66.077,26.187) 66.077,25.314 60.419,25.314 cw(c60.419,25.695) 60.038,25.695 60.038,27.193
  region net +12V: 23.615,61.128 23.615,63.719 cw(c24.2,63.719) 24.2,64.304 87.83,64.304 ccw(c87.83,65.596) 88.744,64.682 90.807,66.744 ccw(c89.847,67.704) 91.204,67.704 91.204,74.343 cw(c92.72,74.343) 91.648,75.415 92.992,76.759 cw(c94.194,75.557) 94.194,77.257 100.348,77.257 cw(c100.348,76.012) 101.593,76.012 101.593,74.31 cw(c100.551,74.31) 100.551,73.269 95.219,73.269 ccw(c95.219,72.406) 94.609,73.016 ccw(c95.61,72.015) 94.194,72.015 94.194,68.293 ccw(c96.145,68.293) 94.766,66.913 ccw(c95.672,67.82) 95.672,66.538 100.627,66.538 cw(c100.627,65.649) 101.516,65.649 101.516,63.693 cw(c100.628,63.693) 100.627,62.804 93.841,62.804 ccw(c93.841,61.957) 93.242,62.556 91.796,61.11 cw(c90.551,62.355) 90.551,60.594 24.148,60.594 cw(c24.148,61.128)
  region net +5V: 62.959,51.73 67.887,51.73 67.887,54.498 62.959,54.498
  region net NetHD1_1: 86.2,40.02 86.2,36.16 90.239,36.16 96.411,42.332 102.126,42.332 102.126,46.777 97.452,46.777 90.696,40.02
  region net NetHD1_2: 72.637,33.874 72.637,30.419 89.299,30.419 96.335,37.455 102.075,37.455 102.075,40.909 97.046,40.909 90.01,33.874
  region net NetHD1_3: 86.175,27.854 86.175,24.145 89.502,24.145 97.275,31.918 102.126,31.918 102.126,36.134 97.275,36.134 88.994,27.854
  region net NetHD6_1: 86.124,22.698 86.124,18.938 89.553,18.938 94.481,23.866 97.43,26.815 102.05,26.815 102.05,31.003 98.189,31.003 89.883,22.698
  region net NetHD6_2: 72.713,16.5 72.713,13.071 88.283,13.071 97.198,21.986 102.05,21.986 102.05,25.855 98.019,25.855 88.664,16.5
  region net NetHD6_3: 86.022,6.823 89.807,6.823 91.458,8.474 91.458,10.582 97.63,16.754 101.745,16.754 101.745,20.996 97.859,20.996 87.75,10.887 86.022,10.887

## Silkscreen, mask and mechanical layers (free items; w line width, h text height)
Top Overlay:
  text "+" at 96.476,77.181 h1 r90
  text "-" at 13.777,75.123 h1 r90
  text "-" at 97.038,68.015 h1 r90
  text "+" at 13.696,67.113 h1 r90
  text "+" at 96.832,65.827 h1 r90
  text "-" at 97.038,57.699 h1 r90
  text "+" at 96.73,55.032 h1 r90
  text "-" at 97.038,47.314 h1 r90

## Text inside footprints (layer, text, board x,y; h text height)
P1: Top Overlay "6" at 7.409,14.443 h1.27; Top Overlay "5" at 7.409,17.11 h1.27; Top Overlay "2" at 17.569,14.493 h1.27; Top Overlay "1" at 17.569,17.135 h1.27
USB: Mechanical 2 "5" at 4.174,29.307 h0.8 r270; Mechanical 2 "1" at 4.174,31.707 h0.8 r270